# EAGLE board rtc (EAGLE 7.2.0)
REV: B
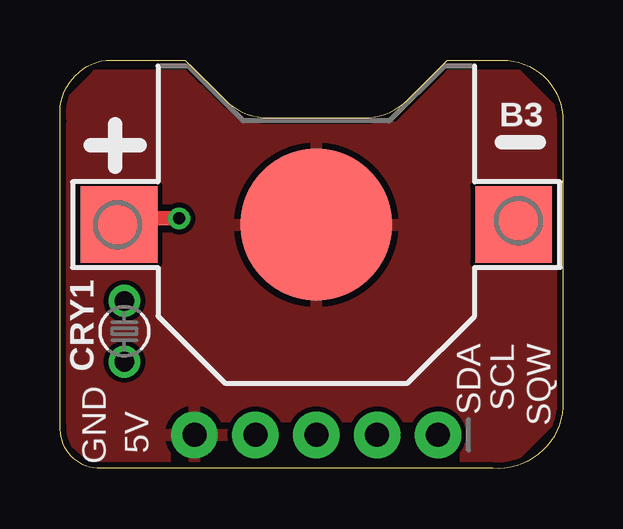
[diagram p0: board, top side]
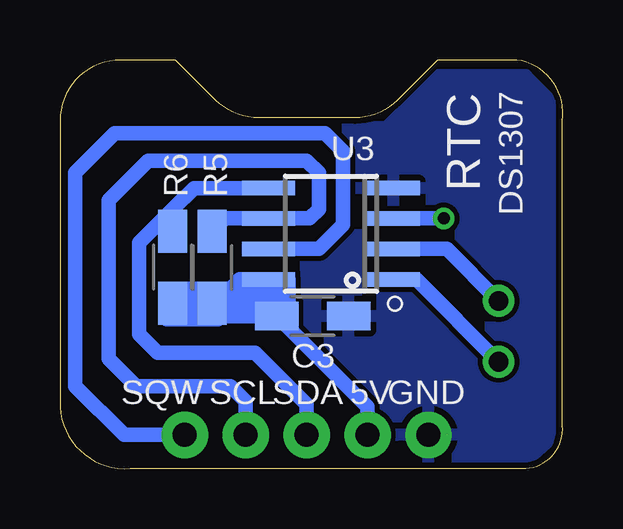
[diagram p1: board, bottom side, seen from below]

Size 20.98 x 17.02 mm. Coordinates in mm from the lower left corner, seen from the top.
Outline: 16.15,17.02 18.44,17.02 arc-90 20.98,14.48 20.98,2.55 arc-90 18.05,0.01 1.54,0.01 arc-90 0.02,1.78 0.02,14.48 arc-90 1.93,17.02 5.23,17.02 6.9,15.35 arc45 8.69,14.61 12.68,14.61 arc45 14.48,15.35 16.15,17.02
Copper layers (1*16): Top 0.035mm / dielectric 1.5mm / Bottom 0.035mm
Design rules "adafruit *": minimum track width 8mil, minimum drill 15.5mil, track to track 8mil, track to pad 8mil, pad to pad 8mil, via to via 8mil, smd to smd 8mil, copper to edge 10mil, drill to drill 8mil, minimum pad ring 10mil, minimum via ring 8mil, stop-mask expansion 2mil, vias tented up to drill 20mil, thermal gap 10mil

## Footprints (pad centres in the part's own frame; a part is rotated, then mirrored left to right if it is on the bottom)
CR1220 = smd 3.2 x 3.2: +$1 -8.225,0; +$2 8.225,0 | smd 6.35 x 6.35: - 0,0
R1206W = smd 1.8 x 1.2: 1 -1.499,0; 2 1.499,0
TC26V = drill 0.813: 1 -1.27,0; 2 1.27,0
1X05_ROUND_76 = drill 1 pad 1.93: 1 -5.08,0; 2 -2.54,0; 3 0,0; 4 2.54,0; 5 5.08,0
SOIC8_150MIL = smd 0.6 x 2.2: 1 -1.905,-2.6; 2 -0.635,-2.6; 3 0.635,-2.6; 4 1.905,-2.6; 5 1.905,2.6; 6 0.635,2.6; 7 -0.635,2.6; 8 -1.905,2.6

## Placement (x,y rotation side)
B3  CR1220  [CR1220]  10.69,10.17 0 top
C3  0.1uF  [R1206W]  10.43,6.36 0 bottom
CRY1  [TC26V]  2.69,5.72 270 top
JP3  [1X05_ROUND_76]  10.69,1.4 180 top
R5  10K  [R1206W]  14.63,8.39 90 bottom
R6  10K  [R1206W]  16.28,8.39 270 bottom
U3  DS1307  [SOIC8_150MIL]  9.67,9.78 90 bottom

## Library data of the parts
B3 JP3 U3 = microbuilder
C3 R5 R6 = rcl
CRY1 = crystal

## Nets
GND2: B3.- C3.2 JP3.5 U3.4
S$2: JP3.1 U3.7
SCL2: JP3.2 R5.2 U3.6
SDA2: JP3.3 R6.1 U3.5
VBAT2: B3.+$1 U3.3
VCC2: C3.1 JP3.4 R5.1 R6.2 U3.8
XI2: CRY1.2 U3.1
XO2: CRY1.1 U3.2

## Tracks (layer width: path | path; a pad name or v marks a point on that pad's centre or on a via)
GND1  (1 unrouted)
GND2
  Top 0.61: B3.- 10.69,9.78
  pour Top: 0.27,1.4 0.27,15.12 1.54,16.39 5.23,16.39 7.39,14.23 14.12,14.23 16.28,16.39 19.07,16.39 20.47,14.99 20.47,2.04 18.82,0.39 1.42,0.39
  pour Bottom: 0.27,1.4 0.27,15.12 1.54,16.39 5.23,16.39 7.39,14.23 14.12,14.23 16.28,16.39 19.07,16.39 20.47,14.99 20.47,2.04 18.82,0.39 1.42,0.39
S$2
  Bottom 0.61: U3.7 10.18,9.15 9.16,10.17 9.16,13.21 9.93,13.98 18.69,13.98 20.34,12.32 20.34,3.43 18.31,1.4 JP3.1
S$5  (1 unrouted)
SCL2
  Bottom 0.5: R5.2 14.9,10.39
  Bottom 0.61: R5.2 14.09,10.42 U3.6 10.56,10.42 10.18,10.8 10.18,12.32 10.69,12.83 17.29,12.83 18.94,11.18 18.94,4.58 17.8,3.43 13.86,3.43 13.23,2.8 JP3.2
SDA2
  Bottom 0.61: U3.5 15.39,11.69 16.28,10.8 | R6.1 16.28,10.8 | 16.28,10.8 17.67,9.4 17.67,5.59 16.91,4.83 12.85,4.83 10.69,2.67 JP3.3
VBAT2  (via drill 0.5 pad 0.81)
  Top 0.61: v4.97,10.42 2.72,10.42 B3.+$1
  Bottom 0.61: U3.3 v4.97,10.42
VCC2
  Bottom 0.61: JP3.4 8.15,2.57 C3.1 12.27,6.69 U3.8 11.45,7.88 11.45,6.61 11.7,6.36 11.7,7.37 11.96,7.63 12.21,7.63 12.47,7.88 13.48,7.88 13.86,7.5 16.28,7.5 16.4,7.37 16.4,6.36 16.53,6.23 14.37,6.23 14.24,6.36 12.09,6.36 11.83,6.61 12.53,7.31 | 12.53,7.31 12.72,7.5 13.23,7.5 13.48,7.24 14.27,7.24 R5.1 | R6.2 15.29,6.89 15.26,6.86 15.64,6.86 15.77,6.74 14.24,6.74 | 14.24,6.74 13.1,6.74 12.53,7.31 | 14.24,6.74 arc-64 13.1,7.12
XI2
  Bottom 0.61: U3.1 6.12,7.88 CRY1.2
XO2
  Bottom 0.61: U3.2 4.85,9.15 CRY1.1

## Text on the board
tPlace: SDA | SCL | SQW | GND | 5V
bPlace: RTC | DS1307 | GND | 5V | SDA | SCL | SQW